# Altium PCB Transmitter.PcbDoc
Units mil, origin at the board's own origin, x right, y up, seen from the top; angles counter-clockwise.
Board outline 3950 x 2825 mil, 2 copper layers (Top Layer, Bottom Layer); 23 components, 32 nets, 101 pads, 29 vias.
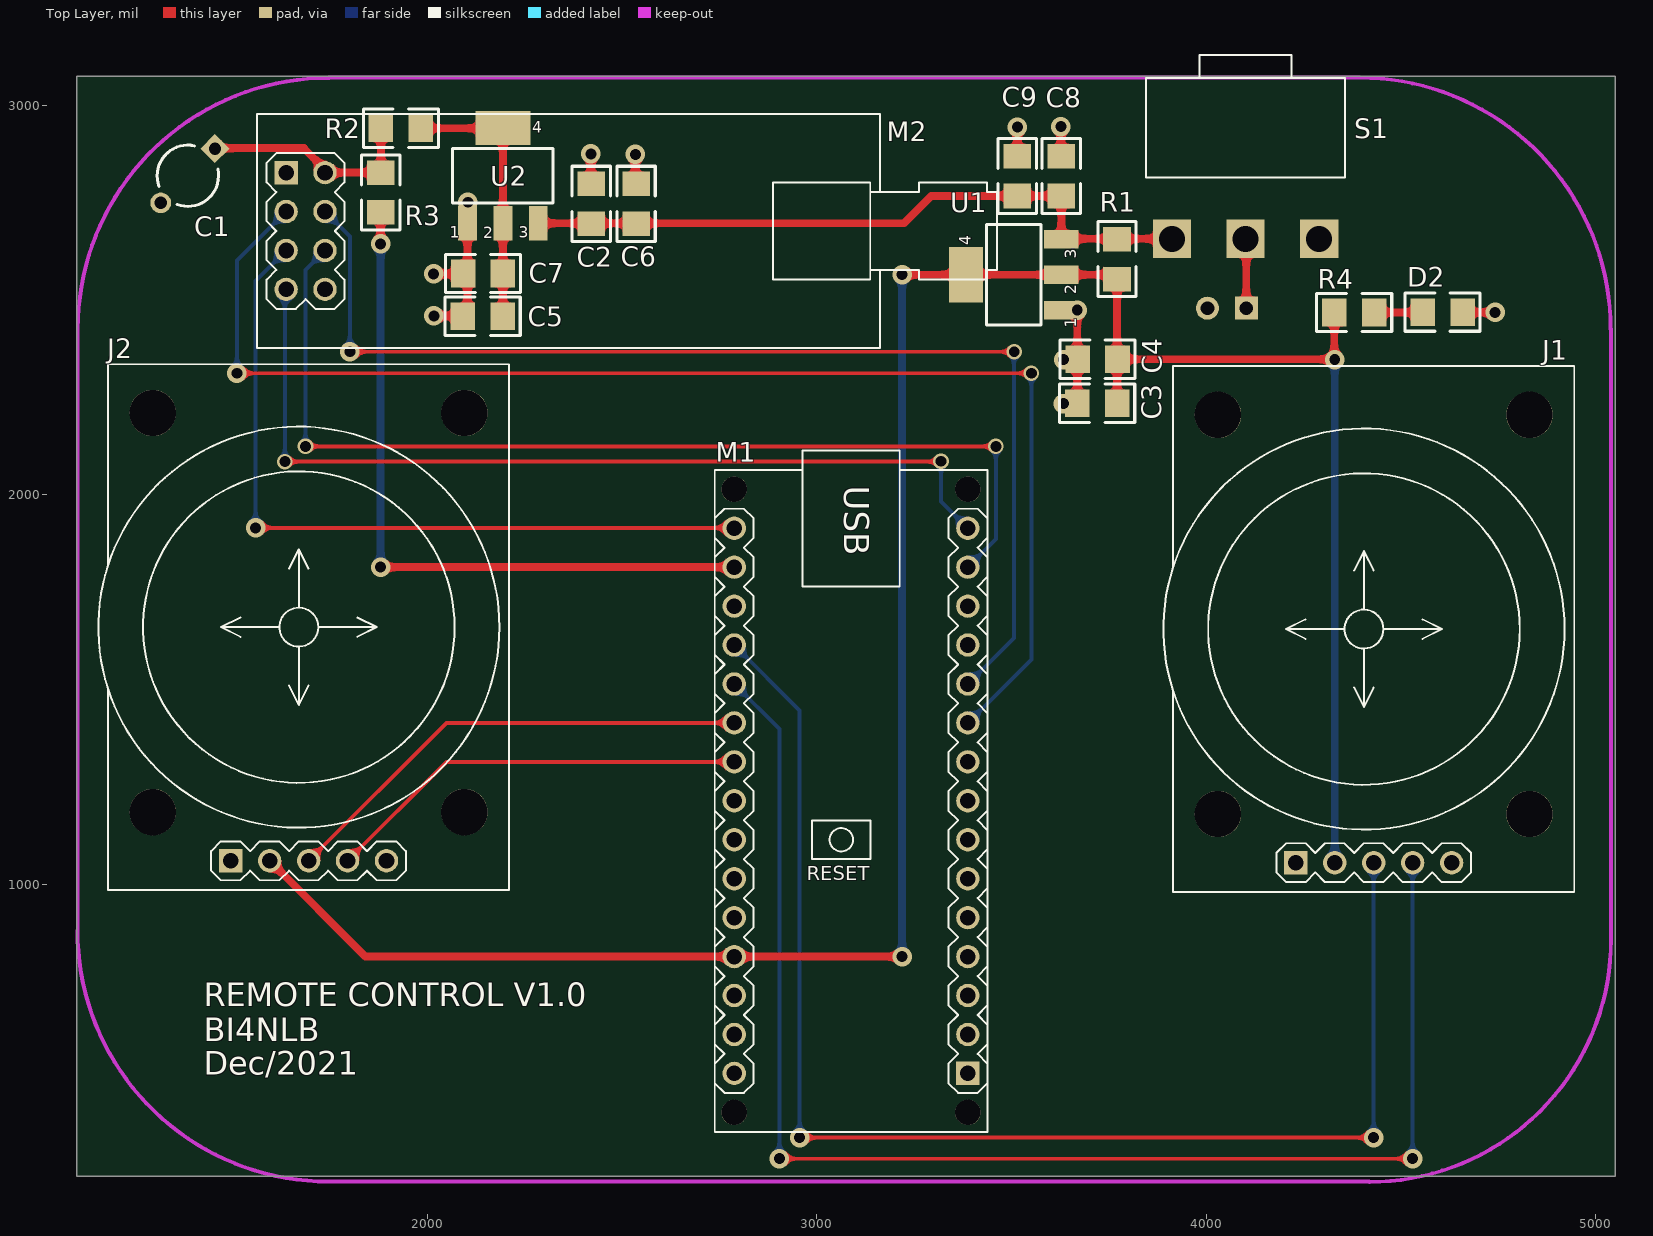
[diagram p0: Top Layer view]
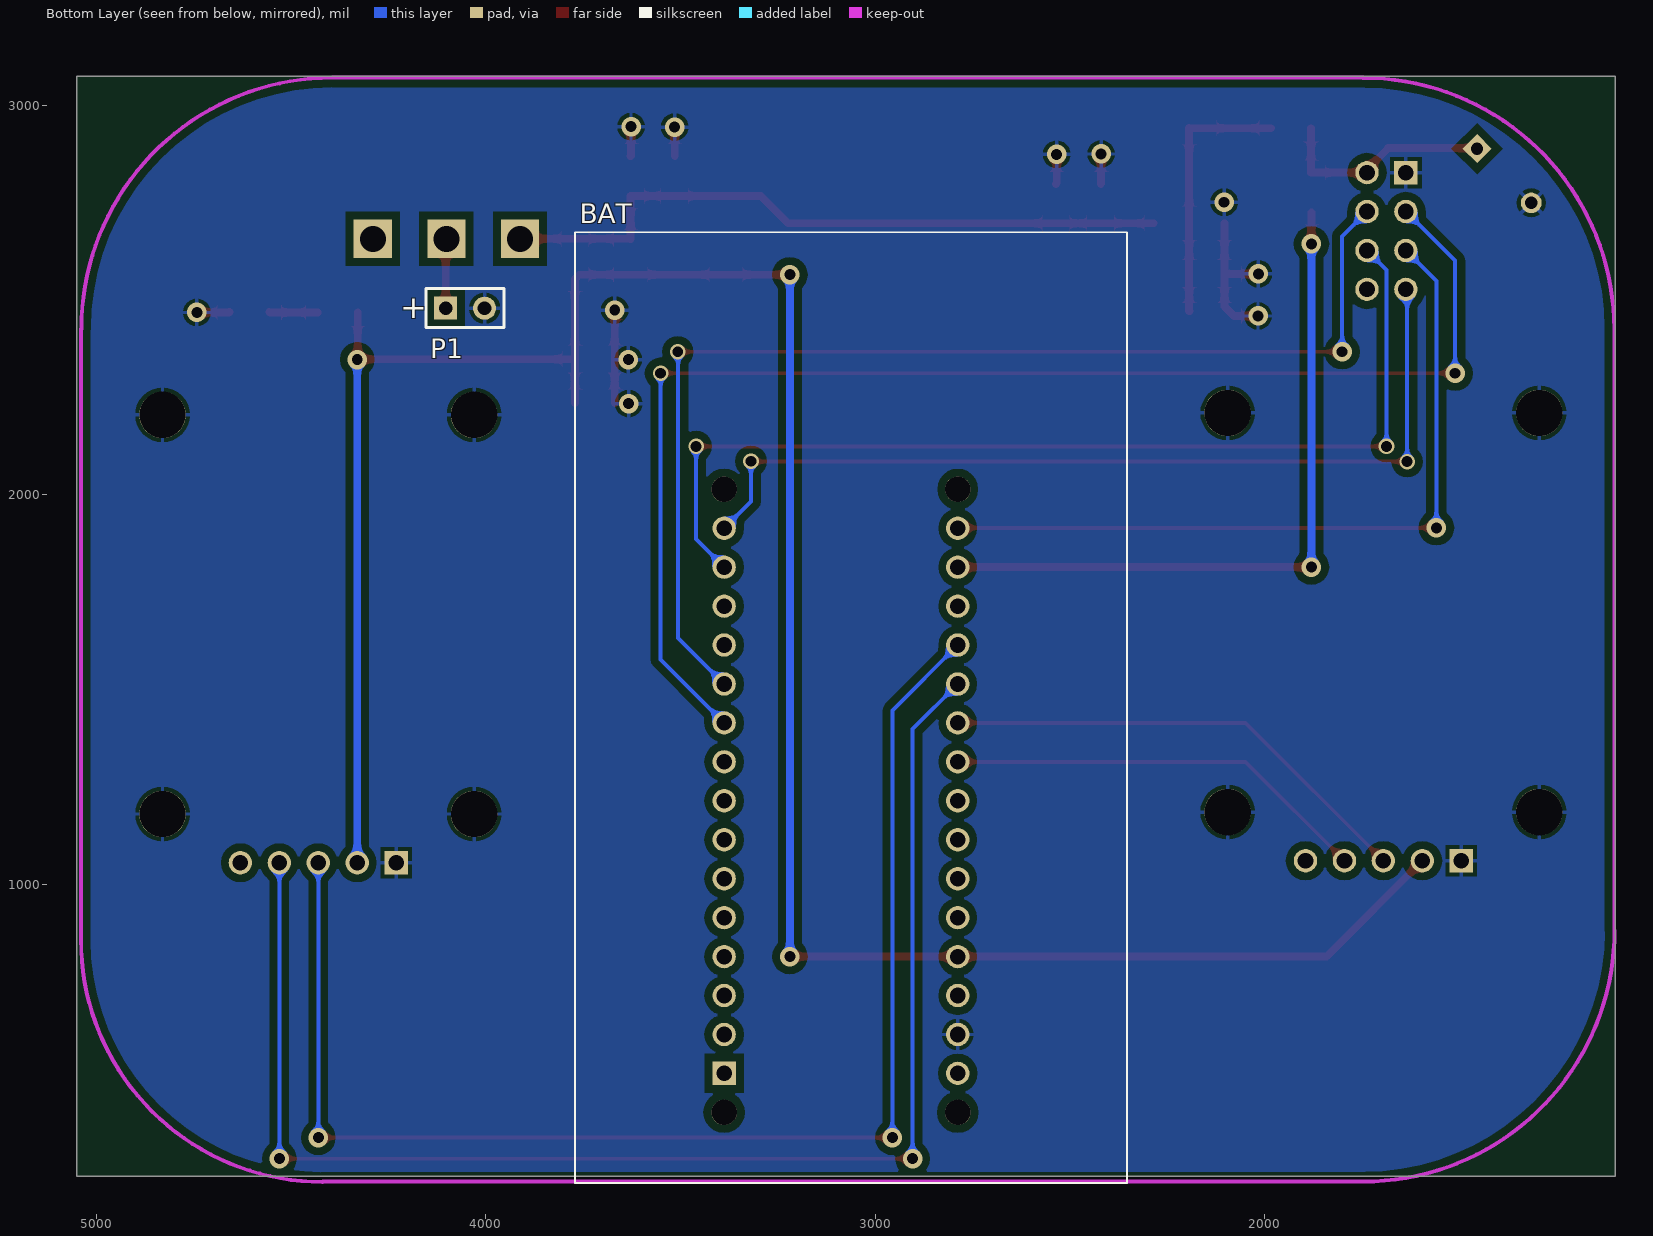
[diagram p1: Bottom Layer view, seen from below]
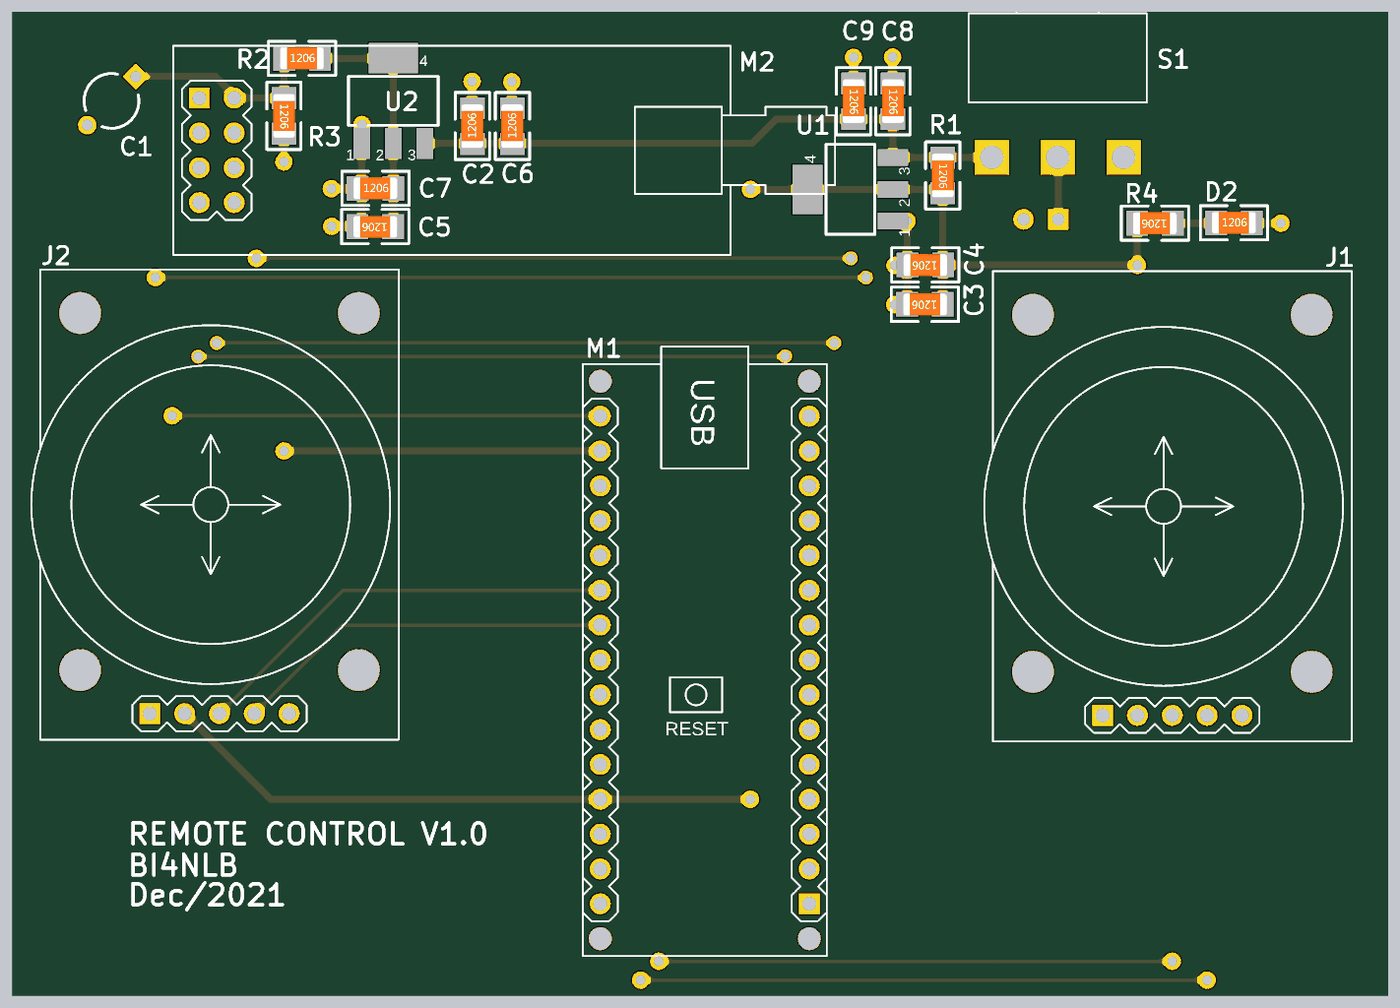
[diagram p2: 3D render of the assembled board from above, using the file's embedded part models]

## Layer stack, top to bottom
Top Solder: solder mask 0.4, Solder Resist, Dk 3.5
Top Layer: signal copper 1.4
Dielectric 1: dielectric 12.6, FR-4, Dk 4.8
Bottom Layer: signal copper 1.4
Bottom Solder: solder mask 0.4, Solder Resist, Dk 3.5

## Board outline
1100,3075 1100,250 5050,250 5050,3075 1100,3075

## Design rules (kind name [scope] priority, off if disabled: settings)
Clearance [All] p1: gap=20
ComponentClearance [All] p1: gap=-10000 collisioncheckmode=3 verticalgap=100000 showdistances=FALSE
PolygonConnect [All] p1: connectstyle=Relief reliefconductorwidth=10 reliefentries=4 polygonreliefangle="90 Angle" airgapwidth=10
RoutingVias [All] p1: holewidth=28 width=50 viastyle="Through Hole" minholewidth=10 minwidth=10 maxholewidth=28 maxwidth=50
SolderMaskExpansion [All] p1: expansion=4
UnpouredPolygon [All] p1: allowunpoured=FALSE
Width [All] p1: maxlimit=100 minlimit=10 preferedwidth=10 minimp=50.000000 maximp=50.000000 favimp=50.000000
28 further rules are at their usual default settings.

## Components (designator, comment, footprint, x,y, rotation, side; value= is the part's Value field where it differs from the comment)
BAT "BAT" BAT 3771,233 r180 bottom locked
C1 "Cap" CAPR5-4X5 1385,2819 r225 top
C2 "Cap" R1206 2421,2747 r90 top
C3 "Cap" R1206 3720,2235 r180 top
C4 "Cap" R1206 3721,2348 r180 top
C5 "Cap" R1206 2142,2458 r180 top
C6 "Cap" R1206 2536,2747 r90 top
C7 "Cap" R1206 2143,2568 r0 top
C8 "Cap" R1206 3628,2818.16 r270 top
C9 "Cap" R1206 3515,2818.16 r270 top
D2 "TX" R1206 4607,2469 r0 top
J1 "<b>2-Axis Analog Joystick</b> with Push Button / <p>Tutorial is available here:<br /> / <a href=\"http://henrysbench.capnfatz.com/henrys-bench/arduino-sensors-and-input/arduino-ps2-joystick-tutorial-keyes-ky-023-deek-robot/\">http://henrysbench.capnfatz.com/henrys-bench/arduino-sensors-and-input/arduino-ps2-joystick-tutorial-keyes-ky-023-deek-robot/</a></p> / <p><b><a href=\"http://www.ebay.com/sch/joystick+ps2+module\">Click here to find device on ebay.com</a></b></p> / <p><img alt=\"photo\" src=\"http://www.diymodules.org/img/device-photo.php?name=JOYSTICK-2AXIS-BUTTON\"></p>" JOYSTICK-2AXIS-BUTTON 4430,1655 r90 top locked
J2 "<b>2-Axis Analog Joystick</b> with Push Button / <p>Tutorial is available here:<br /> / <a href=\"http://henrysbench.capnfatz.com/henrys-bench/arduino-sensors-and-input/arduino-ps2-joystick-tutorial-keyes-ky-023-deek-robot/\">http://henrysbench.capnfatz.com/henrys-bench/arduino-sensors-and-input/arduino-ps2-joystick-tutorial-keyes-ky-023-deek-robot/</a></p> / <p><b><a href=\"http://www.ebay.com/sch/joystick+ps2+module\">Click here to find device on ebay.com</a></b></p> / <p><img alt=\"photo\" src=\"http://www.diymodules.org/img/device-photo.php?name=JOYSTICK-2AXIS-BUTTON\"></p>" JOYSTICK-2AXIS-BUTTON 1695,1660 r90 top locked
M1 "<b>Arduino Nano 3.0</b> and compatible devices / <p>More details available here:<br> / <a href=\"https://www.arduino.cc/en/Main/ArduinoBoardNano\">https://www.arduino.cc/en/Main/ArduinoBoardNano</a></p> / <p><b><a href=\"http://www.ebay.com/sch/arduino+nano\">Click here to find device on ebay.com</a></b></p> /  / <p><img alt=\"photo\" src=\"http://www.diymodules.org/img/device-photo.php?name=ARDUINO-NANO-3.0\"></p>" ARDUINO-NANO-3.0 3088,1214 r270 top locked
M2 "<b>2.4 GHz Wireless Module</b> based on <b>NRF24L01</b> chip with preamplifier and external antenna / <p><b><a href=\"http://www.ebay.com/sch/nrf24l01+pa+lna+sma\">Click here to find device on ebay.com</a></b></p> /  / <p><img alt=\"photo\" src=\"http://www.diymodules.org/img/device-photo.php?name=WIRELESS-NRF24L01-PA-EXT\"></p>" WIRELESS-NRF24L01-PA-EXT 2362.2,2677.17 r0 top locked
P1 "BATTERY" HDR1X2 4103,2479 r180 bottom
R1 "0" R1206 3771,2605 r270 top
R2 "0" R1206 1932,2941 r0 top
R3 "0" R1206 1880,2776 r270 top
R4 "1K" R1206 4380,2468 r180 top
S1 "SW" KEY 4101,2657 r0 top
U1 "LM1117IMPX-5.0" LINEAR_SOT223 3506,2565 r90 top
U2 "LM1117IMPX-3.3" LINEAR_SOT223 2194,2819 r0 top

## Footprints (in the part's own frame and the unit in brackets; to place one, negate y for a bottom-side part, rotate by r counter-clockwise, add the part's x,y. Pads: shape width x height; smd on the part's side, far side on the other; paste and mask are expansions set on the pad)
ARDUINO-NANO-3.0 [mil]
  round 65 hole 65: 1(-800,-300) 1(-800,300) 1(800,-300) 1(800,300)
  rect 60x60 hole 40: J1.1(700,300)
  round 60 hole 40: J1.2(600,300) J1.3(500,300) J1.4(400,300) J1.5(300,300) J1.6(200,300) J1.7(100,300) J1.8(0,300) J1.9(-100,300) J1.10(-200,300) J1.11(-300,300) J1.12(-400,300) J1.13(-500,300) J1.14(-600,300) J1.15(-700,300) J2.1(700,-300) J2.2(600,-300) J2.3(500,-300) J2.4(400,-300) J2.5(300,-300) J2.6(200,-300) J2.7(100,-300) J2.8(0,-300) J2.9(-100,-300) J2.10(-200,-300) J2.11(-300,-300) J2.12(-400,-300) J2.13(-500,-300) J2.14(-600,-300) J2.15(-700,-300)
  silkscreen extent -900,-350 850,350
BAT [mil]
  silkscreen extent 0,0 1417,2441
CAPR5-4X5 [mm] "Capacitor; 2 Leads"
  rect 1.35x1.35 hole 0.8: 1(-2.5,0)
  round 1.35 hole 0.8: 2(2.5,0)
  silkscreen extent -1.69,-2 1.82,2
HDR1X2 [mm] "Connector; Header; 2 Position"
  rect 1.5x1.5 hole 0.9: 1(0,0)
  round 1.5 hole 0.9: 2(2.54,0)
  silkscreen extent -1.27,-1.27 3.81,1.27
JOYSTICK-2AXIS-BUTTON [mil]
  rect 60x60 hole 40: 1(-600,200)
  round 119 hole 119: 1(-475,-400) 1(-475,400) 1(550,-400) 1(550,400)
  round 60 hole 40: 2(-600,100) 3(-600,0) 4(-600,-100) 5(-600,-200)
  silkscreen extent -675,-515 675,540
KEY [mm]
  rect 2.5x2.5 hole 1.7: 1(-4.8,0) 2(0,0) 3(4.8,0)
  silkscreen extent -6.5,4 6.5,12
LINEAR_SOT223 [mil] "LINEAR_SOT223"
  rect 48x88 smd: 1(-91,-122) 2(0,-122) 3(91,-122)
  rect 142x87 smd: 4(0,123)
  silkscreen extent -129,-70 129,70
R1206 [mm]
  rect 1.6x1.8 smd: 1(-1.301,0) 2(1.299,0)
  silkscreen extent -2.45,-1.25 2.45,1.25, body extent -1.6,-0.79 1.6,0.81, height 1
WIRELESS-NRF24L01-PA-EXT [mil]
  rect 60x60 hole 40: 1(-725,150)
  round 60 hole 40: 2(-625,150) 3(-725,50) 4(-625,50) 5(-725,-50) 6(-625,-50) 7(-725,-150) 8(-625,-150)
  silkscreen extent -800,-300 1100,300

## Part data
C1 C2 C3 C4 C5 C6 C7 C8 C9: "Capacitor"
D2: library part LED0, "Typical INFRARED GaAs LED"
J1 J2: library part JOYSTICK-2AXIS-BUTTON
M1: library part ARDUINO-NANO-3.0
M2: library part WIRELESS-NRF24L01-PA-EXT
P1: library part "Header 2", "Header, 2-Pin"
R1 R2 R3 R4: library part R_SM_1206, "RJ-1206-"
S1: library part SW-SPST, "Single-Pole, Single-Throw Switch"
U1 U2: library part 0022_LM1117IMPX-5.0, "Low-dropout linear regulator 5V  -LM1117IMPX-5.0"

## Via types
v1: diameter 50, hole 28, Top Layer to Bottom Layer, 23 vias
v2: diameter 40, hole 28, Top Layer to Bottom Layer, 6 vias

## Nets (pads, with @x,y where several pads share a name; then routed paths per layer and width w, separated by ;. In a path a pad name is that pad's centre, name@x,y a point inside that pad or via, vN(x,y) a via of type N, cw(c..) or ccw(c..) an arc to the next point about the centre after c; other vN are vias at no path point)
+3.3V: M1.J2.14 R3.2 | length 1818.8
  Top Layer w20: v1(1880,1814) M1.J2.14 ; v1(1880,2644) R3.2
  Bottom Layer w20: v1(1880,1814) v1(1880,2644)
+3.3V_AUX: C5.1 C7.2 R2.2 U2.2 U2.4 | length 681.5
  Top Layer w20: R2.2 2193,2941 U2.4@2193.2,2941.2 ; C5.1@2193.2,2471 2194,2471.8 U2.2 U2.4
+5V: C3.1 C4.1 J1.2 J2.2 M1.J2.4 R1.2 R4.2 U1.2 U1.4 | length 6321.3
  Top Layer w20: J2.2 1841,814 M1.J2.4 v1(3219,814) ; v1(3219,2565) U1.4 U1.2 3759.84,2565 R1.2 3771.2,2553.64 C3.1 ; C4.1 4329,2348 4328.84,2348.16 R4.2
  Bottom Layer w20: v1(3219,814) v1(3219,2565) ; J1.2 v1(4330,2347)
A0: J1.3 M1.J2.12 | length 3511.6
  Top Layer w10: v1(2956,349) v1@4427,349
  Bottom Layer w10: M1.J2.12 2956,1446 v1(2956,349) ; v1(4430,349) J1.3
A1: J1.4 M1.J2.11 | length 3654
  Top Layer w10: v1(2904,295) v1(4530,295) v1@4531,295
  Bottom Layer w10: M1.J2.11 2904,1398 v1(2904,295) ; v1(4530,295) J1.4
A2: J2.3 M1.J2.10 | length 1239.6
  Top Layer w10: J2.3 2049,1414 M1.J2.10
A3: J2.4 M1.J2.9 | length 1098.2
  Top Layer w10: J2.4 2049,1314 M1.J2.9
A4: M1.J2.8
A5: M1.J2.7
A6: M1.J2.6
A7: M1.J2.5
BAT: C2.1 C6.1 C8.2 C9.2 R1.1 S1.1 U1.3 U2.3 | length 1767.4
  Top Layer w20: U2.3 3224,2697 3294,2767 C8.2 U1.3 3629,2657 S1.1
D0: M1.J1.2
D1: M1.J1.1
D2: M1.J1.5
D3: M1.J1.6
D4: M1.J1.7
D5: M1.J1.8
D6: M1.J1.9
D7: M1.J1.10 M2.3 | length 3473
  Top Layer w10: v1(1511,2312) v2(3551,2312)
  Bottom Layer w10: v1(1511,2312) 1511,2600.96 M2.3 ; M1.J1.10 3551,1577 v2(3551,2312)
D8: M1.J1.11 M2.4 | length 2994.5
  Top Layer w10: v1(1801,2367) v2(3507,2367)
  Bottom Layer w10: M2.4 1801,2663.37 v1(1801,2367) ; M1.J1.11 3506,1632 v2@3506,2367
D9: M1.J1.12
D10: M1.J1.13
D11: M1.J1.14 M2.6 | length 2637.2
  Top Layer w10: v2(1687,2124) v2@3459,2124 ; v2@3459,2125 v2(3460,2124)
  Bottom Layer w10: v2(1687,2124) 1687,2576.96 M2.6 ; M1.J1.14 3460,1886 v2(3460,2124)
D12: M1.J1.15 M2.7 | length 2330.6
  Top Layer w10: v2(1634,2085) 3315.2,2085 v2@3319,2088.8
  Bottom Layer w10: v2(1634,2085) 1634,2523.96 M2.7 ; v2(3319,2086) 3319,1983 M1.J1.15
D13: M1.J2.15 M2.5 | length 1973.6
  Top Layer w10: v1(1559,1915) M1.J2.15@2788,1915
  Bottom Layer w10: v1(1559,1915) 1559,2548.96 M2.5
GND: C1.2 C2.2 C3.2 C4.2 C5.2 C6.2 C7.1 C8.1 C9.1 D2.2 J1.1 J2.1 M1.J2.2 M2.1 P1.2 U1.1 U2.1 | length 1013.9
  Top Layer w20: v1(2016,2567) 2090.8,2567 C7.1 ; v1(2017,2459) 2078.84,2459 2103,2483.16 U2.1 ; v1(2420,2875) 2420,2799.16 C2.2 ; v1(2534,2874) 2534,2800.16 C6.2 ; C9.1 v1(3515,2944) ; v1(3627,2945) 3627,2870.36 C8.1 ; C3.2 v1(3668.84,2474) ; D2.2 4659.16,2468 v1(4742,2468)
  other v1: 3633,2234 3634,2347 2104,2751
NetD2_1: D2.1 R4.1 | length 125
  Top Layer w20: R4.1 4554.8,2468 D2.1
NetP1_1: P1.1 S1.2 | length 178.8
  Top Layer w20: S1.2 4103,2655 P1.1
RST: M1.J2.3
VCCA: C1.1 M2.2 R2.1 R3.1 | length 575.5
  Top Layer w20: C1.1@1454.6,2900 1464.6,2890 1683,2890 1737.2,2835.8 M2.2 1880.63,2827.17 1880.8,2827 R2.1
VIN: M1.J2.1
pads on no net: J1.5 J2.5 M1.1 M1.J1.3 M1.J1.4 M1.J2.13 M2.8 S1.3

## Polygon pours and split planes (outlines as drawn)
GND on Bottom Layer "Bottom Layer-No Net" (solid, remove dead copper, pour order 2): 1100,3070 1100,240 5040,240 5040,3070 1100,3070

## Keep-outs
Keep-Out Layer:
  lines w10: 1101.5,881.49 ccw(c1746.51,881.23) 1746.25,236.22 ; 1102.36,881.23 1102.36,2426 cw(c1747.12,2425.74) 1747.36,3070.5 ; 1746.51,236.22 4418.69,236.22 ; 1747.37,3070.87 4394,3070.87 cw(c4393.74,2426.11) 5038.5,2425.85 ; 4419,235.32 ccw(c4418.69,856) 5039.37,857.22 ; 5039.37,856 5039.37,2425.86

## Silkscreen, mask and mechanical layers (free items; w line width, h text height)
Top Overlay:
  text "REMOTE CONTROL V1.0" at 1426,686 h60
  text "BI4NLB" at 1426,596 h60
  text "Dec/2021" at 1426,511 h60
Bottom Overlay:
  text "+" at 4220,2453 h60
Mechanical 1:
  lines w10: 1099.5,882.48 ccw(c1744.51,882.23) 1744.25,237.22 ; 1100.36,882.23 1100.36,2427 cw(c1745.12,2426.74) 1745.37,3071.5 ; 1744.51,237.22 4416.69,237.22 ; 1745.37,3071.87 4392,3071.87 cw(c4391.74,2427.11) 5036.5,2426.86 ; 4417,236.32 ccw(c4416.69,857) 5037.37,858.22 ; 5037.37,857 5037.37,2426.86

## Text inside footprints (layer, text, board x,y; h text height)
M1: Top Overlay "RESET" at 2973.87,997.58 h62; Top Overlay "USB" at 3048.87,2022.58 h108.5 r270
U1: Top Overlay "3" at 3676,2606 h49.6 r90; Top Overlay "4" at 3406,2640 h49.6 r90; Top Overlay "1" at 3676,2429.07 h49.6 r90; Top Overlay "2" at 3676.37,2514.19 h49.6 r90
U2: Top Overlay "3" at 2235,2649 h49.6; Top Overlay "4" at 2269,2919 h49.6; Top Overlay "1" at 2058.07,2649 h49.6; Top Overlay "2" at 2143.19,2648.63 h49.6